# Altium PCB PCB6.PcbDoc (part 1 of 2)
Units mm, origin at the board's own origin, x right, y up, seen from the top; angles counter-clockwise.
Board outline 52.58 x 35.69 mm, 2 copper layers (Top Layer, Bottom Layer); 47 components, 153 nets, 462 pads, 249 vias.
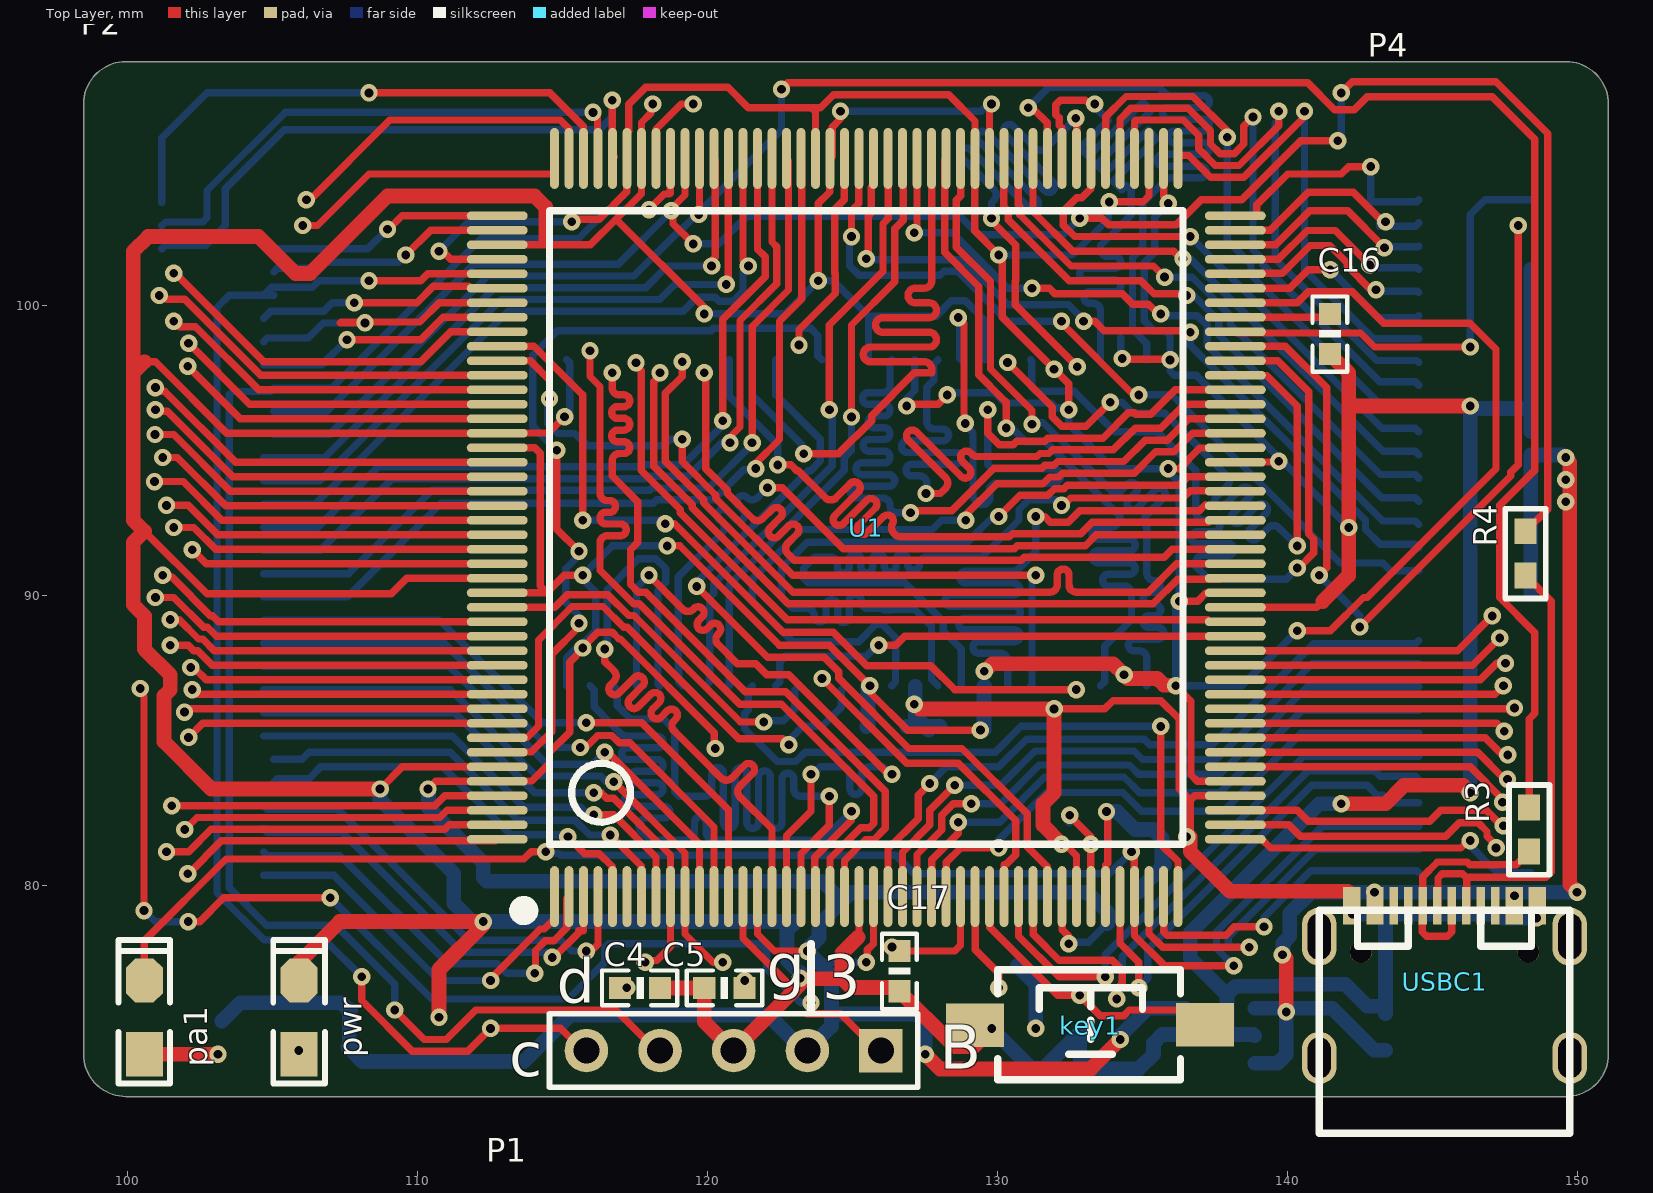
[diagram p0: Top Layer view]
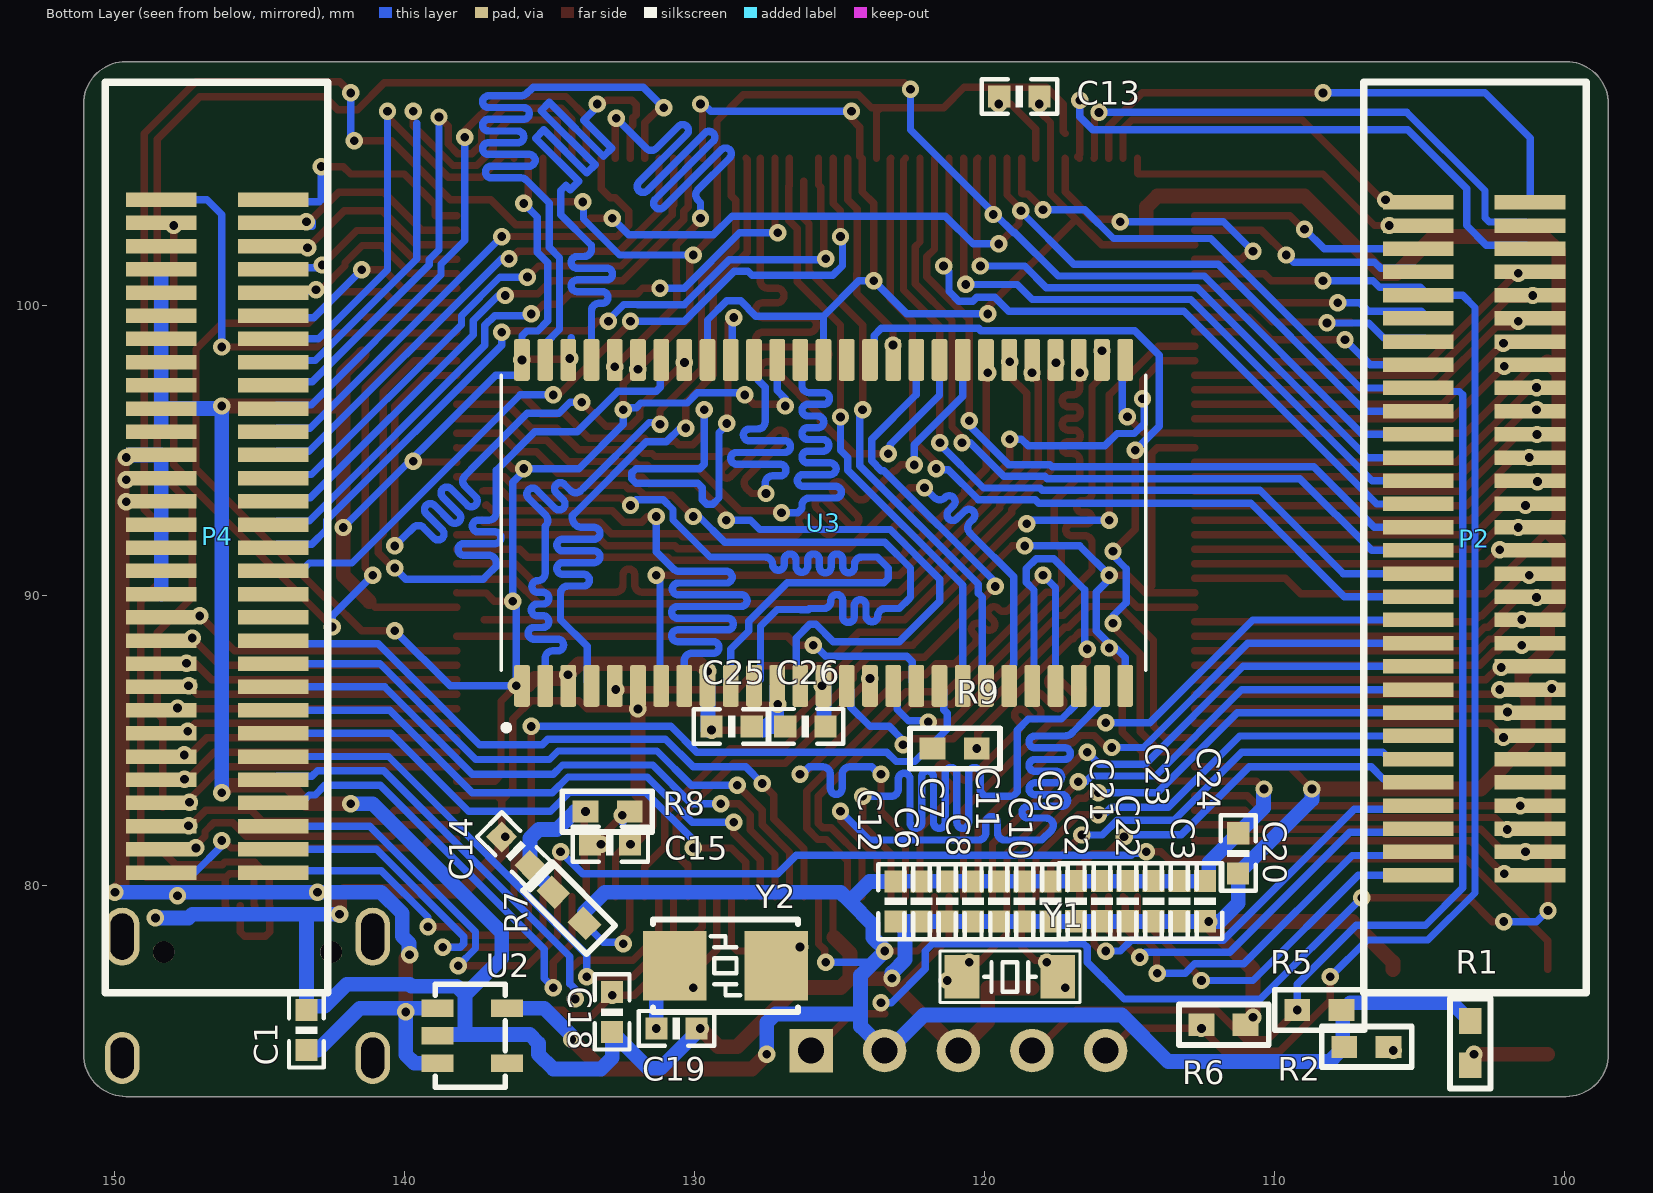
[diagram p1: Bottom Layer view, seen from below]

## Layer stack, top to bottom
Top Solder: solder mask 0.0102, Solder Resist, Dk 3.5
Top Layer: signal copper 0.0356
Dielectric 1: dielectric 0.32, FR-4, Dk 4.8
Bottom Layer: signal copper 0.0356
Bottom Solder: solder mask 0.0102, Solder Resist, Dk 3.5

## Board outline
98.488,74.168 98.488,106.934 cw(c99.949,106.934) 99.949,108.395 149.606,108.395 cw(c149.606,106.934) 151.067,106.934 151.067,74.168 cw(c149.606,74.168) 149.606,72.707 99.949,72.707 cw(c99.949,74.168)

## Design rules (kind name [scope] priority, off if disabled: settings)
Clearance [All] p1: gap=0.15 ignorepadtopadclearanceinfootprint=FALSE
Length Length_1 [InNetClass('sdram_d')] p1: maxlimit=28.6 minlimit=27.6
Length [InNetClass('sdram_a')] p2: maxlimit=27.443 minlimit=26.443
PolygonConnect [All] p1: connectstyle=Relief reliefconductorwidth=0.254 reliefentries=4 polygonreliefangle="90 Angle" airgapwidth=0.254
RoutingVias [All] p1: holewidth=0.711 width=1.27 viastyle="Through Hole" minholewidth=0.711 minwidth=1.27 maxholewidth=0.711 maxwidth=1.27
SolderMaskExpansion [All] p1: expansion=0.102 istentingtop=FALSE
Width [All] p1: maxlimit=1.524 minlimit=0.254 preferedwidth=0.254 minimp=50.000000 maximp=50.000000 favimp=50.000000
30 further rules are at their usual default settings.

## Classes and differential pairs
net class sdram_d: FMC_D0 FMC_D1 FMC_D2 FMC_D3 FMC_D4 FMC_D5 FMC_D6 FMC_D7 FMC_D8 FMC_D9 FMC_D10 FMC_D11 FMC_D12 FMC_D13 FMC_D14 FMC_D15
net class sdram_a: FMC_A0 FMC_A1 FMC_A2 FMC_A3 FMC_A4 FMC_A5 FMC_A6 FMC_A7 FMC_A8 FMC_A9 FMC_A10 FMC_A11 FMC_A12

## Components (designator, comment, footprint, x,y, rotation, side; value= is the part's Value field where it differs from the comment)
C1 "Cap Semi" 0603-C 143.385,74.308 r90 bottom value=105
C2 "Cap Semi" 0603-C 116.842,78.753 r90 bottom value=104
C3 "Cap Semi" 0603-C 113.286,78.753 r90 bottom value=105
C4 "" 0603-c 118.364,76.454 r180 top value=10P
C5 "" 0603-c 119.888,76.454 r0 top value=10P
C6 "" 0603-c 122.172,80.124 r270 bottom value=104
C7 "" 0603-c 121.283,80.124 r270 bottom value=104
C8 "" 0603-c 120.394,80.124 r270 bottom value=104
C9 "" 0603-c 117.727,80.124 r270 bottom value=104
C10 "" 0603-c 118.616,80.124 r270 bottom value=104
C11 "" 0603-c 119.505,80.124 r270 bottom value=106
C12 "" 0603-c 123.061,80.124 r270 bottom value=104
C13 "" 0603-c 119.494,107.19 r180 bottom value=2.2UF
C14 "" 0603-c 136.652,81.661 r225 bottom value=104
C15 "" 0603-c 133.604,81.407 r180 bottom value=104
C16 "" 0603-c 141.463,99.695 r270 top value=2.2UF
C17 "" 0603-c 126.619,77.724 r270 top value=20P
C18 "" 0603-c 132.842,74.93 r90 bottom value=104
C19 "" 0603-c 131.318,75.057 r180 bottom value=20P
C20 "104" 0603-c 111.254,80.404 r90 bottom
C21 "104" 0603-c 115.953,78.753 r90 bottom
C22 "104" 0603-c 115.064,78.753 r90 bottom
C23 "104" 0603-c 114.175,78.753 r90 bottom
C24 "104" 0603-c 112.397,78.753 r90 bottom
C25 "104" 0603-c 128.029,85.469 r0 bottom
C26 "104" 0603-c 126.873,85.471 r180 bottom
key1 "KEY" "TSW SMD-3*6*2.5" 133.223,75.184 r0 top
P1 "Header 5" HDR1X5 125.984,74.295 r180 top
P2 "Header 30X2" BTB60 103.143,91.947 r180 top
P4 "Header 30X2" BTB60 146.431,92.026 r0 top
pa1 "LED" "LED 0805G" 100.584,75.438 r90 top (schematic designator PPS1)
pwr "LED" "LED 0805G" 105.918,75.438 r90 top (schematic designator PPS2)
R1 "1k" 0603-R 103.251,73.787 r90 bottom
R2 "1k" 0603-r 106.072,74.422 r0 bottom
R3 "0Ω" 0603-r 148.336,81.153 r90 top
R4 "0Ω" 0603-r 148.209,90.678 r90 top
R5 "10K" 0603-r 107.696,75.692 r0 bottom
R6 "10K" 0603-r 110.998,75.184 r0 bottom
R7 "0" 0603-r 133.796,78.678 r45 bottom
R8 "0" 0603-r 133.761,82.533 r180 bottom
R9 "10K" 0603-r 120.269,84.709 r0 bottom
U1 "STM32H743IIT6" "LQFP176 24x24_M" 125.476,92.329 r0 top locked
U2 "RT9013" SOT23-5 137.668,74.803 r270 bottom
U3 "W9825G6KH-6" SOP80P1176X120-54N 125.552,92.488 r90 bottom locked
USBC1 "TYPE-C 3.1" TYPE-C-USB-17 145.417,76.665 r0 top locked
Y1 "32.768KHz" "OSC 3215-2P" 119.126,76.835 r180 bottom
Y2 "25M" "OSC 5032-2P" 128.933,77.216 r180 bottom

## Footprints (in the part's own frame and the unit in brackets; to place one, negate y for a bottom-side part, rotate by r counter-clockwise, add the part's x,y. Pads: shape width x height; smd on the part's side, far side on the other; paste and mask are expansions set on the pad)
0603-C [mil]
  rect 30x30 smd: 1(0,0) 2(54.5,-0.06)
  silkscreen extent -24,-24 79,24
0603-c [mil]
  rect 30x30 smd: 1(0,0) 2(54.5,-0.06)
  silkscreen extent -24,-24 79,24
0603-R [mil]
  rect 35x30 smd: 1(0,0) 2(60,0)
  silkscreen extent -31,-28 91,28, body extent -22,-19 82,19, height 39
0603-r [mil]
  rect 35x30 smd: 1(0,0) 2(60,0)
  silkscreen extent -31,-28 91,28, body extent -22,-19 82,19, height 39
BTB60 [mm]
  rect 2.44x0.5 smd far side: 1(-1.905,-11.594) 2(1.955,-11.594) 3(-1.905,-10.794) 4(1.955,-10.794) 5(-1.905,-9.994) 6(1.955,-9.994) 7(-1.905,-9.194) 8(1.955,-9.194) 9(-1.905,-8.394) 10(1.955,-8.394) 11(-1.905,-7.594) 12(1.955,-7.594) 13(-1.905,-6.794) 14(1.955,-6.794) 15(-1.905,-5.994) 16(1.955,-5.994) 17(-1.905,-5.194) 18(1.955,-5.194) 19(-1.905,-4.394) 20(1.955,-4.394) 21(-1.905,-3.594) 22(1.955,-3.594) 23(-1.905,-2.794) 24(1.955,-2.794) 25(-1.905,-1.994) 26(1.955,-1.994) 27(-1.905,-1.194) 28(1.955,-1.194) 29(-1.905,-0.394) 30(1.955,-0.394) 31(-1.905,0.406) 32(1.955,0.406) 33(-1.905,1.206) 34(1.955,1.206) 35(-1.905,2.006) 36(1.955,2.006) 37(-1.905,2.806) 38(1.955,2.806) 39(-1.905,3.606) 40(1.955,3.606) 41(-1.905,4.406) 42(1.955,4.406) 43(-1.905,5.206) 44(1.955,5.206) 45(-1.905,6.006) 46(1.955,6.006) 47(-1.905,6.806) 48(1.955,6.806) 49(-1.905,7.606) 50(1.955,7.606) 51(-1.905,8.406) 52(1.955,8.406) 53(-1.905,9.206) 54(1.955,9.206) 55(-1.905,10.006) 56(1.955,10.006) 57(-1.905,10.806) 58(1.955,10.806) 59(-1.905,11.606) 60(1.955,11.606)
HDR1X5 [mm] "Connector; Header; 5 Position"
  rect 1.5x1.5 hole 0.9: 1(0,0)
  round 1.5 hole 0.9: 2(2.54,0) 3(5.08,0) 4(7.62,0) 5(10.16,0)
  silkscreen extent -1.27,-1.27 11.43,1.27
"LED 0805G" [mil] "绿色0805LED"
  rect 60x50 smd: 1(-50,0)
  oct 60x50 smd: 2(50,0)
  silkscreen extent -90,-35 105,35, body extent -39,-25 39,25, height 32
"LQFP176 24x24_M" [mm] "176脚，体宽24x24mm，脚距0.5mm"
  oval 0.3x2.1 smd: 1(-10.75,-12.727) 2(-10.25,-12.727) 3(-9.75,-12.727) 4(-9.25,-12.727) 5(-8.75,-12.727) 6(-8.25,-12.727) 7(-7.75,-12.727) 8(-7.25,-12.727) 9(-6.75,-12.727) 10(-6.25,-12.727) 11(-5.75,-12.727) 12(-5.25,-12.727) 13(-4.75,-12.727) 14(-4.25,-12.727) 15(-3.75,-12.727) 16(-3.25,-12.727) 17(-2.75,-12.727) 18(-2.25,-12.727) 19(-1.75,-12.727) 20(-1.25,-12.727) 21(-0.75,-12.727) 22(-0.25,-12.727) 23(0.25,-12.727) 24(0.75,-12.727) 25(1.25,-12.727) 26(1.75,-12.727) 27(2.25,-12.727) 28(2.75,-12.727) 29(3.25,-12.727) 30(3.75,-12.727) 31(4.25,-12.727) 32(4.75,-12.727) 33(5.25,-12.727) 34(5.75,-12.727) 35(6.25,-12.727) 36(6.75,-12.727) 37(7.25,-12.727) 38(7.75,-12.727) 39(8.25,-12.727) 40(8.75,-12.727) 41(9.25,-12.727) 42(9.75,-12.727) 43(10.25,-12.727) 44(10.75,-12.727) 89(10.75,12.727) 90(10.25,12.727) 91(9.75,12.727) 92(9.25,12.727) 93(8.75,12.727) 94(8.25,12.727) 95(7.75,12.727) 96(7.25,12.727) 97(6.75,12.727) 98(6.25,12.727) 99(5.75,12.727) 100(5.25,12.727) 101(4.75,12.727) 102(4.25,12.727) 103(3.75,12.727) 104(3.25,12.727) 105(2.75,12.727) 106(2.25,12.727) 107(1.75,12.727) 108(1.25,12.727) 109(0.75,12.727) 110(0.25,12.727) 111(-0.25,12.727) 112(-0.75,12.727) 113(-1.25,12.727) 114(-1.75,12.727) 115(-2.25,12.727) 116(-2.75,12.727) 117(-3.25,12.727) 118(-3.75,12.727) 119(-4.25,12.727) 120(-4.75,12.727) 121(-5.25,12.727) 122(-5.75,12.727) 123(-6.25,12.727) 124(-6.75,12.727) 125(-7.25,12.727) 126(-7.75,12.727) 127(-8.25,12.727) 128(-8.75,12.727) 129(-9.25,12.727) 130(-9.75,12.727) 131(-10.25,12.727) 132(-10.75,12.727)
  oval 2.1x0.3 smd: 45(12.727,-10.75) 46(12.727,-10.25) 47(12.727,-9.75) 48(12.727,-9.25) 49(12.727,-8.75) 50(12.727,-8.25) 51(12.727,-7.75) 52(12.727,-7.25) 53(12.727,-6.75) 54(12.727,-6.25) 55(12.727,-5.75) 56(12.727,-5.25) 57(12.727,-4.75) 58(12.727,-4.25) 59(12.727,-3.75) 60(12.727,-3.25) 61(12.727,-2.75) 62(12.727,-2.25) 63(12.727,-1.75) 64(12.727,-1.25) 65(12.727,-0.75) 66(12.727,-0.25) 67(12.727,0.25) 68(12.727,0.75) 69(12.727,1.25) 70(12.727,1.75) 71(12.727,2.25) 72(12.727,2.75) 73(12.727,3.25) 74(12.727,3.75) 75(12.727,4.25) 76(12.727,4.75) 77(12.727,5.25) 78(12.727,5.75) 79(12.727,6.25) 80(12.727,6.75) 81(12.727,7.25) 82(12.727,7.75) 83(12.727,8.25) 84(12.727,8.75) 85(12.727,9.25) 86(12.727,9.75) 87(12.727,10.25) 88(12.727,10.75) 133(-12.727,10.75) 134(-12.727,10.25) 135(-12.727,9.75) 136(-12.727,9.25) 137(-12.727,8.75) 138(-12.727,8.25) 139(-12.727,7.75) 140(-12.727,7.25) 141(-12.727,6.75) 142(-12.727,6.25) 143(-12.727,5.75) 144(-12.727,5.25) 145(-12.727,4.75) 146(-12.727,4.25) 147(-12.727,3.75) 148(-12.727,3.25) 149(-12.727,2.75) 150(-12.727,2.25) 151(-12.727,1.75) 152(-12.727,1.25) 153(-12.727,0.75) 154(-12.727,0.25) 155(-12.727,-0.25) 156(-12.727,-0.75) 157(-12.727,-1.25) 158(-12.727,-1.75) 159(-12.727,-2.25) 160(-12.727,-2.75) 161(-12.727,-3.25) 162(-12.727,-3.75) 163(-12.727,-4.25) 164(-12.727,-4.75) 165(-12.727,-5.25) 166(-12.727,-5.75) 167(-12.727,-6.25) 168(-12.727,-6.75) 169(-12.727,-7.25) 170(-12.727,-7.75) 171(-12.727,-8.25) 172(-12.727,-8.75) 173(-12.727,-9.25) 174(-12.727,-9.75) 175(-12.727,-10.25) 176(-12.727,-10.75)
  silkscreen extent -12.06,-13.46 10.92,10.92, body extent -13,-13 13,13, height 1.45
"OSC 3215-2P" [mm] "3.2*1.5*0.6mm(长宽高)"
  rect 1.2x1.5 smd: 1(-1.65,0) 2(1.65,0)
  silkscreen extent -2.41,-0.89 2.41,0.89, body extent -1.6,-0.75 1.6,0.75, height 0.61
"OSC 5032-2P" [mm] "5mm*3.2mm*0.8mm(长*宽*高)"
  rect 2.2x2.4 smd: 1(-1.75,0) 2(1.75,0)
  silkscreen extent -2.5,-1.6 2.5,1.6, body extent -2.5,-1.6 2.5,1.6, height 0.86
SOP80P1176X120-54N [mm]
  rrect25% 1.44x0.54 smd: 1(-5.62,10.4) 2(-5.62,9.6) 3(-5.62,8.8) 4(-5.62,8) 5(-5.62,7.2) 6(-5.62,6.4) 7(-5.62,5.6) 8(-5.62,4.8) 9(-5.62,4) 10(-5.62,3.2) 11(-5.62,2.4) 12(-5.62,1.6) 13(-5.62,0.8) 14(-5.62,0) 15(-5.62,-0.8) 16(-5.62,-1.6) 17(-5.62,-2.4) 18(-5.62,-3.2) 19(-5.62,-4) 20(-5.62,-4.8) 21(-5.62,-5.6) 22(-5.62,-6.4) 23(-5.62,-7.2) 24(-5.62,-8) 25(-5.62,-8.8) 26(-5.62,-9.6) 27(-5.62,-10.4) 28(5.62,-10.4) 29(5.62,-9.6) 30(5.62,-8.8) 31(5.62,-8) 32(5.62,-7.2) 33(5.62,-6.4) 34(5.62,-5.6) 35(5.62,-4.8) 36(5.62,-4) 37(5.62,-3.2) 38(5.62,-2.4) 39(5.62,-1.6) 40(5.62,-0.8) 41(5.62,0) 42(5.62,0.8) 43(5.62,1.6) 44(5.62,2.4) 45(5.62,3.2) 46(5.62,4) 47(5.62,4.8) 48(5.62,5.6) 49(5.62,6.4) 50(5.62,7.2) 51(5.62,8) 52(5.62,8.8) 53(5.62,9.6) 54(5.62,10.4)
  silkscreen extent -7.16,-11.11 5.08,11.11, body extent -5.88,-11.11 5.88,11.11, height 1.2
SOT23-5 [mm]
  rect 0.6x1.1 smd: 1(-0.95,-1.2) 2(0,-1.2) 3(0.95,-1.2) 4(0.95,1.2) 5(-0.95,1.2)
  silkscreen extent -1.78,-1.27 1.78,1.14, body extent -1.55,-0.9 1.55,0.9, height 1.45
"TSW SMD-3*6*2.5" [mm] "3*6*2.5mm"
  rect 2x1.5 smd: 1(-3.996,-0.02) 2(3.937,0)
  silkscreen extent -3.21,-1.9 3.09,1.9, body extent -4,-1.88 4,1.62, height 2.59
TYPE-C-USB-17 [mm]
  oval 1.2x1.8 hole 0.8 slot 1.4 at 90 deg: 0(-4.32,-2.624) 0(4.32,-2.624)
  oval 1.2x2 hole 0.8 slot 1.6 at 90 deg: 0(-4.32,1.556) 0(4.32,1.556)
  rect 0.3x1.3 smd: A1(-3.35,2.623) A4(-2.55,2.623) A5(-1.25,2.623) A6(-0.25,2.623) A7(0.25,2.623) A8(-1.75,2.624) A9(2.55,2.623) A12(3.35,2.623) B1(3.05,2.623) B4(2.25,2.623) B5(1.75,2.623) B6(0.75,2.623) B7(-0.75,2.623) B8(1.25,2.624) B9(-2.25,2.623) B12(-3.05,2.623)
  round 0.75 hole 0.75 unplated: ""(-2.89,1.026) ""(2.89,1.026)
  silkscreen extent -4.32,-5.23 4.32,2.47

## Part data
C1 C2 C3: "Capacitor (Semiconductor SIM Model)", LatestRevisionDate=29-May-2009, LatestRevisionNote="IPC-7351 Footprint Added.", PackageDescription="Chip Capacitor", PackageReference=C1206, Published=8-Jun-2000, Publisher="Altium Limited"
C4 C5 C6 C7 C8 C9 C10 C11 C13 C14 C15 C16 C17 C18 C19: library part Cap_1_1, "Capacitor", LatestRevisionDate=17-Jul-2002, LatestRevisionNote="Re-released for DXP Platform.", PackageDescription="Radial Cap, Thru-Hole; 2 Leads; 0.3 in Pin Spacing", PackageReference=RAD-0.3, Published=8-Jun-2000, Publisher="Altium Limited"
C12: library part Cap_1_1, "104", LatestRevisionDate=17-Jul-2002, LatestRevisionNote="Re-released for DXP Platform.", PackageDescription="Radial Cap, Thru-Hole; 2 Leads; 0.3 in Pin Spacing", PackageReference=RAD-0.3, Published=8-Jun-2000, Publisher="Altium Limited"
C20 C21 C22 C23 C24 C25 C26: library part CAP, "无极性电容"
P1: "Header, 5-Pin"
P2 P4: "Header, 30-Pin, Dual row", LatestRevisionDate=17-Jul-2002, LatestRevisionNote="Re-released for DXP Platform.", Publisher="Altium Limited"
R1 R2 R3 R4 R5 R6 R7 R8: library part RES, "Resistor", LatestRevisionDate=17-Jul-2002, LatestRevisionNote="Re-released for DXP Platform.", PackageDescription="Axial Device, Thru-Hole; 2 Leads; 0.4 in Pin Spacing", PackageReference=AXIAL-0.4, Published=8-Jun-2000, Publisher="Altium Limited"
R9: library part RES
U1: BOM_LCSC Assembly=Yes, BOM_Manufacturer=STMicroelectronics, BOM_Manufacturer Part=STM32H743IIT6, BOM_Supplier=LCSC, BOM_Supplier Part=C89597, Contributor=LCSC, SMT Type=Extend, spicePre=U, spiceSymbolName=STM32H743IIT6
U3: library part IS42S16160B, "32MB SDRAM"
Y1 Y2: library part XTAL, "Crystal Oscillator", LatestRevisionDate=17-Jul-2002, LatestRevisionNote="Re-released for DXP Platform.", Published=8-Jun-2000, Publisher="Altium Limited"

## Via types
v1: diameter 0.6, hole 0.3, Top Layer to Bottom Layer, 249 vias

## Nets (pads, with @x,y where several pads share a name; then routed paths per layer and width w, separated by ;. In a path a pad name is that pad's centre, name@x,y a point inside that pad or via, vN(x,y) a via of type N, cw(c..) or ccw(c..) an arc to the next point about the centre after c; other vN are vias at no path point)
3.3V: C2.2 C3.2 C6.1 C7.1 C8.1 C9.1 C10.1 C11.1 C12.1 C20.2 C21.2 C22.2 C23.2 C24.2 C25.2 C26.2 P1.2 R1.2 R2.2 R5.1 R7.1 R9.1 U1.15 U1.23 U1.36 U1.49 U1.62 U1.72 U1.82 U1.91 U1.103 U1.114 U1.127 U1.136 U1.149 U1.159 U1.172 U2.5 U3.1 U3.3 U3.9 U3.14 U3.27 U3.43 U3.49 | length 240.9
  Top Layer w0.254: v1(110.363,83.312) 110.63,83.579 U1.172@112.749,83.579 112.758,83.588 113.941,83.588 114.554,84.201 114.554,84.582 115.247,85.275 115.247,87.688 115.697,88.138 v1(115.697,88.175) 115.697,88.192 116.22,88.715 116.718,88.715 116.948,88.485 117.001,88.485 120.232,85.254 120.232,84.746 v1(120.269,84.709) ; v1@110.795,101.93 111.146,101.579 U1.136@112.749,101.579 ; U1.159@112.749,90.079 114.463,90.079 ; U1.149@112.749,95.079 114.041,95.079 114.231,94.889 114.231,90.311 114.463,90.079 ; v1(115.316,102.87) 115.408,102.962 116.275,102.962 117.217,103.904 117.217,105.047 U1.127@117.226,105.056 ; v1(115.697,90.678) 115.062,90.678 114.463,90.079 ; U1.127@117.221,105.918 117.29,105.987 117.29,106.93 117.871,107.511 120.708,107.511 121.412,106.807 123.577,106.807 ; v1(118.618,91.694) 119.053,91.694 122.482,88.265 124.196,88.265 125.593,86.868 v1(125.603,86.868) 125.603,86.642 126.901,85.344 v1(129.413,85.344) ; U1.15@121.726,79.602 121.726,78.31 122.312,77.724 v1(123.444,77.724) ; U1.114@123.726,105.056 123.726,106.658 123.577,106.807 ; v1(125.476,77.343) 125.51,77.377 125.51,77.765 125.726,77.981 U1.23@125.726,79.602 ; v1(126.873,96.52) 126.936,96.584 127.953,96.584 v1(128.27,96.901) ; U1.36@132.226,79.602 132.235,79.593 132.235,78.458 132.461,78.232 v1(132.461,77.978) ; v1(132.461,96.393) 132.461,97.282 v1(131.953,97.79) 130.163,99.58 130.163,101.612 v1(130.048,101.727) 129.217,102.558 129.217,105.047 U1.103@129.226,105.056 129.226,106.348 128.317,107.257 124.348,107.257 123.898,106.807 123.577,106.807 ; v1(133.859,103.556) 135.018,103.556 135.226,103.764 U1.91@135.226,105.056 ; v1(135.89,94.361) 136.271,94.361 136.98,95.07 138.194,95.07 U1.72@138.203,95.079 ; v1(136.144,86.868) 136.675,86.337 136.675,83.797 136.893,83.579 U1.49@138.203,83.579 ; v1(136.271,89.789) 136.906,89.789 137.187,90.07 138.194,90.07 U1.62@138.203,90.079 ; U1.82@138.203,100.079 140.338,100.079 140.716,100.457 142.24,100.457 143.32,99.377 146.294,99.377 147.193,98.479 147.193,94.361 142.748,89.916 142.621,89.916 141.478,88.773 v1(140.335,88.773)
  Top Layer w0.508: v1(127.508,74.168) 128.016,73.66 133.223,73.66 v1(134.239,74.676) ; v1(129.54,87.376) 129.565,87.376 129.819,87.63 133.985,87.63 v1(134.366,87.249) ; v1@134.493,87.122 135.509,87.122 135.745,86.886 136.126,86.886 v1(136.144,86.868)
  Bottom Layer w0.254: v1(110.744,101.854) 111.76,102.87 v1(115.316,102.87) ; U3.27@115.152,86.868 115.152,87.847 115.48,88.175 v1(115.697,88.175) 115.697,88.323 116.147,88.773 116.147,90.101 115.697,90.551 v1(115.697,90.678) 116.713,91.694 v1(118.618,91.694) ; 123.919,77.343 v1(125.476,77.343) ; v1(126.873,96.52) 126.873,96.774 127.152,97.053 U3.43@127.152,98.108 ; v1(128.27,96.901) 128.339,96.97 129.906,96.97 130.252,96.624 131.849,96.624 132.014,96.459 132.395,96.459 v1(132.461,96.393) 132.461,95.885 133.985,94.361 v1(135.89,94.361) 135.89,94.267 136.271,93.886 v1(136.271,89.789) 136.271,89.695 136.144,89.568 v1(136.144,86.868) 138.43,86.868 v1(140.335,88.773) ; v1(130.048,101.727) 132.588,101.727 133.831,102.97 133.831,103.528 v1(133.859,103.556) ; v1(132.461,77.978) 132.507,78.024 133.142,78.024 R7.1@133.796,78.678
  Bottom Layer w0.508: R1.2@103.251,75.311 103.886,75.946 107.379,75.946 107.632,75.692 R5.1@107.696,75.692 107.646,75.642 R2.2@107.646,74.472 ; R2.2@107.596,74.422 107.66,74.422 107.787,74.295 107.787,74.231 108.104,73.914 113.665,73.914 115.269,75.518 122.094,75.518 123.317,74.295 P1.2@123.444,74.295 124.275,75.126 124.275,76.893 v1(123.444,77.724) 123.444,77.788 123.848,78.192 123.848,78.636 124.65,79.438 ; v1(110.363,83.312) 110.381,83.294 110.381,82.659 C20.2@111.252,81.788 112.268,80.772 112.268,80.264 C24.2@112.395,80.137 112.401,80.131 114.173,80.131 115.062,80.131 C2.2@116.846,80.131 ; C2.2@116.84,80.137 C2.2@116.846,80.131 ; 124.471,75.554 127.21,75.554 127.508,75.257 v1(127.508,74.168) ; C26.2@125.489,85.469 125.536,85.517 U3.14@125.536,86.852 ; C25.2@129.54,85.344 129.54,85.866 129.536,85.862 129.536,86.852 U3.9@129.552,86.868 ; R7.1@133.796,78.678 133.796,79.059 133.1,79.756 124.968,79.756 124.65,79.438 ; v1(134.239,74.676) 134.239,74.803 135.189,75.753 U2.5@136.468,75.753 ; C2.2@116.846,80.131 118.616,80.131 121.283,80.131 123.055,80.131 C12.1@123.061,80.124 123.965,80.124 124.65,79.438
5V: C1.1 P4.26 P4.28 P4.30 P4.32 P4.34 P4.36 P4.38 U2.1 U2.3 USBC1.A4 USBC1.A9 USBC1.B4 USBC1.B9 | length 42.8
  Top Layer w0.508: v1(139.827,77.597) 139.954,77.47 v1(139.954,75.626) ; v1(149.594,94.742) 149.594,94.717 149.733,94.578 149.733,80.035 149.987,79.781 v1(149.987,79.756)
  Bottom Layer w0.508: U2.3@138.868,73.853 139.656,73.853 139.954,74.151 v1(139.954,75.626) ; U2.1@138.868,75.753 141.544,75.753 142.989,74.308 C1.1@143.385,74.308 ; v1(139.827,77.597) 139.845,77.615 139.845,77.996 140.081,78.232 140.081,79.025 140.812,79.756 v1(143.002,79.756) v1(149.987,79.756) ; P4.26@148.386,90.032 P4.28@148.386,90.832 P4.30@148.386,91.632 P4.32@148.386,92.432 P4.34@148.386,93.232 P4.36@148.386,94.032 P4.38@148.386,94.832 148.39,94.828 149.483,94.828 149.569,94.742 v1(149.594,94.742)
  other v1: 147.828,79.629 149.594,93.218 149.594,93.98
BOOT0: P1.1 P2.44 U1.166 | length 48.4
  Top Layer w0.254: v1@100.457,86.614 100.572,86.499 v1(100.572,79.121) ; v1@102.108,78.74 102.489,78.74 103.314,79.566 v1(106.998,79.566) ; v1(102.235,86.741) 102.397,86.579 U1.166@112.749,86.579 ; 123.444,75.565 124.587,75.565 P1.1@125.984,74.168
  Bottom Layer w0.254: v1@100.584,79.121 100.965,78.74 v1(102.096,78.74) ; v1(106.998,79.566) 110.49,76.073 115.189,76.073 116.459,77.343 116.459,77.851 116.586,77.978 121.793,77.978 122.047,77.724 122.047,77.109 123.21,75.946 v1(123.571,75.946)
  other v1: 100.44,86.779
C0: U1.32 U3.16 | length 11.5
  Top Layer w0.254: v1(123.952,87.122) 126.873,84.201 128.651,84.201 130.625,82.227 130.625,81.041 130.287,80.703 130.226,80.703 U1.32@130.226,79.602
C1: P4.11 U1.33 | length 19.3
  Top Layer w0.254: U1.33@130.726,79.602 130.726,78.239 132.13,76.835 v1(133.72,76.835)
  Bottom Layer w0.254: v1(133.72,76.835) 133.72,77.597 140.555,84.432 P4.11@144.526,84.432
C2: P4.9 U1.34 | length 20.5
  Top Layer w0.254: U1.34@131.226,79.602 131.235,79.593 131.235,78.301 132.135,77.401 132.7,77.401 132.711,77.412 133.959,77.412 134.297,77.074 134.297,76.596 134.112,76.411 v1(134.112,76.073)
  Bottom Layer w0.254: v1(134.112,76.073) 134.112,76.411 134.297,76.596 134.297,77.528 140.716,83.947 143.002,83.947 143.194,83.755 144.403,83.755 P4.9@144.526,83.632
C3: U1.35 U3.37 | length 28.2
  Top Layer w0.254: v1(119.634,90.297) 122.071,87.86 124.03,87.86 124.529,87.361 124.529,87.126 126.946,84.709 128.778,84.709 131.029,82.458 131.029,81.315 131.717,80.627 131.717,79.611 U1.35@131.726,79.602
  Bottom Layer w0.254: v1(119.634,90.297) 119.634,90.452 123.474,94.292 123.556,94.292 123.894,94.63 123.894,95.371 122.352,96.913 U3.37@122.352,98.108
FMC_A0: U1.16 U3.23 | length 26.1
  Top Layer w0.254: v1(116.459,88.138) 116.459,88.011 116.459,87.703 116.777,87.385 cw(c116.598,87.205) 116.777,87.026 116.656,86.904 ccw(c116.799,86.761) 116.656,86.618 ccw(c116.799,86.761) 116.941,86.618 117.476,87.153 cw(c117.619,87.01) 117.762,87.153 cw(c117.619,87.01) 117.762,86.867 117.325,86.431 ccw(c117.468,86.288) 117.325,86.145 ccw(c117.468,86.288) 117.611,86.145 118.047,86.582 cw(c118.19,86.439) 118.333,86.582 cw(c118.19,86.439) 118.333,86.296 118.111,86.073 ccw(c118.253,85.931) 118.111,85.788 ccw(c118.253,85.931) 118.396,85.788 118.619,86.01 cw(c118.762,85.867) 118.904,86.01 cw(c118.762,85.867) 118.904,85.725 118.851,85.671 ccw(c119.03,85.491) 118.851,85.311 119.226,84.936 119.813,84.349 120.474,83.688 ccw(c120.653,83.868) 120.833,83.688 121.28,84.135 cw(c121.422,83.992) 121.565,84.135 cw(c121.422,83.992) 121.565,83.849 121.119,83.403 ccw(c121.298,83.223) 121.119,83.043 122.226,81.936 122.226,81.189 U1.16@122.226,79.602
  Bottom Layer w0.254: v1(116.459,88.138) 116.551,88.23 116.551,90.189 117.617,91.255 118.222,91.255 118.56,90.917 118.56,90.439 118.295,90.174 118.295,86.925 U3.23@118.352,86.868
FMC_A1: U1.17 U3.24 | length 25.7
  Top Layer w0.254: v1(117.983,90.678) 119.061,89.6 119.151,89.51 ccw(c119.331,89.69) 119.51,89.51 119.537,89.537 cw(c119.68,89.394) 119.823,89.537 cw(c119.68,89.394) 119.823,89.251 119.7,89.129 ccw(c119.843,88.986) 119.7,88.843 ccw(c119.843,88.986) 119.986,88.843 120.108,88.965 cw(c120.251,88.823) 120.394,88.965 cw(c120.251,88.823) 120.394,88.68 120.367,88.653 ccw(c120.547,88.473) 120.367,88.294 121.031,87.63 121.041,87.63 121.666,87.63 122.047,87.249 122.809,87.249 126.238,83.82 v1(126.365,83.82) ; U1.17@122.726,79.602 122.726,81.705 123.571,82.55 v1(123.571,83.82)
  Bottom Layer w0.254: U3.24@117.552,86.868 117.552,90.247 v1(117.983,90.678) ; v1(123.571,83.82) 123.639,83.82 123.893,84.074 124.127,84.074 124.658,84.074 cw(c124.658,83.82) 124.912,83.82 124.912,83.329 ccw(c125.114,83.329) 125.114,83.127 ccw(c125.114,83.329) 125.316,83.329 125.316,83.82 cw(c125.57,83.82) 125.57,84.074 126.043,84.074 126.297,83.82 v1(126.365,83.82)
FMC_A2: U1.18 U3.25 | length 27
  Top Layer w0.254: U1.18@123.226,79.602 123.226,81.083 124.206,82.063 v1(124.206,83.058)
  Bottom Layer w0.254: U3.25@116.752,86.868 116.895,86.725 116.895,86.178 117.348,85.725 118.491,85.725 118.872,85.344 118.872,83.207 119.021,83.058 119.765,83.058 119.892,83.058 ccw(c119.892,83.312) 120.146,83.312 120.146,83.849 cw(c120.348,83.849) 120.348,84.051 cw(c120.348,83.849) 120.55,83.849 120.55,82.159 ccw(c120.752,82.159) 120.752,81.957 ccw(c120.752,82.159) 120.954,82.159 120.954,83.849 cw(c121.156,83.849) 121.156,84.051 cw(c121.156,83.849) 121.358,83.849 121.358,82.159 ccw(c121.56,82.159) 121.56,81.957 ccw(c121.56,82.159) 121.762,82.159 121.762,83.735 cw(c121.964,83.735) 121.964,83.937 cw(c121.964,83.735) 122.166,83.735 122.166,82.159 ccw(c122.368,82.159) 122.368,81.957 ccw(c122.368,82.159) 122.57,82.159 122.57,83.653 cw(c122.772,83.653) 122.772,83.855 cw(c122.772,83.653) 122.974,83.653 122.974,83.312 ccw(c123.228,83.312) 123.228,83.058 123.793,83.058 123.92,83.058 v1(124.206,83.058)
FMC_A3: U1.19 U3.26 | length 26.2
  Top Layer w0.254: U1.19@123.698,80.538 123.698,80.959 124.968,82.229 v1(124.968,82.55)
  Bottom Layer w0.254: U3.26@115.952,86.868 116.095,86.725 116.095,86.143 116.655,85.583 116.655,85.575 116.864,85.366 116.991,85.239 116.992,85.238 ccw(c117.235,85.483) 117.235,85.138 118.266,85.138 cw(c118.266,84.936) 118.468,84.936 cw(c118.266,84.936) 118.266,84.734 117.238,84.734 ccw(c117.238,84.532) 117.036,84.532 ccw(c117.238,84.532) 117.238,84.33 118.266,84.33 cw(c118.266,84.128) 118.468,84.128 cw(c118.266,84.128) 118.266,83.926 117.546,83.926 ccw(c117.546,83.724) 117.344,83.724 ccw(c117.546,83.724) 117.546,83.522 118.266,83.522 cw(c118.266,83.32) 118.468,83.32 cw(c118.266,83.32) 118.266,83.118 117.337,83.118 ccw(c117.337,82.916) 117.135,82.916 ; 117.135,82.916 ccw(c117.337,82.916) 117.337,82.714 118.508,82.714 cw(c118.508,82.512) 118.71,82.512 cw(c118.508,82.512) 118.508,82.31 117.883,82.31 ccw(c117.883,82.056) 117.704,81.877 118.007,81.574 118.028,81.553 118.364,81.553 119.299,81.553 ccw(c119.299,81.807) 119.553,81.807 119.553,82.159 cw(c119.755,82.159) 119.755,82.361 cw(c119.755,82.159) 119.957,82.159 119.957,81.807 ccw(c120.211,81.807) 120.211,81.553 120.65,81.553 123.971,81.553 v1(124.968,82.55)
FMC_A4: U1.20 U3.29 | length 26.8
  Top Layer w0.254: v1(115.951,98.425) 115.951,97.536 116.297,97.19 116.297,94.274 116.297,93.513 ccw(c116.551,93.513) 116.551,93.259 116.629,93.259 cw(c116.629,93.057) 116.831,93.057 cw(c116.629,93.057) 116.629,92.855 116.496,92.855 ccw(c116.496,92.653) 116.294,92.653 ccw(c116.496,92.653) 116.496,92.451 116.996,92.451 cw(c116.996,92.249) 117.198,92.249 cw(c116.996,92.249) 116.996,92.047 116.551,92.047 ccw(c116.551,91.793) 116.297,91.793 116.297,91.262 116.297,90.85 117.45,89.697 117.647,89.697 121.111,86.233 122.555,86.233 125.73,83.058 125.73,82.122 125.581,81.973 125.283,81.973 124.226,80.916 U1.20@124.226,79.602
FMC_A5: U1.21 U3.30 | length 26.5
  Top Layer w0.254: v1(116.713,97.663) 116.713,97.155 ccw(c116.967,97.155) 116.967,96.901 117.117,96.901 cw(c117.117,96.699) 117.319,96.699 cw(c117.117,96.699) 117.117,96.497 116.903,96.497 ccw(c116.903,96.295) 116.701,96.295 ccw(c116.903,96.295) 116.903,96.093 117.117,96.093 cw(c117.117,95.891) 117.319,95.891 cw(c117.117,95.891) 117.117,95.689 116.903,95.689 ccw(c116.903,95.487) 116.701,95.487 ccw(c116.903,95.487) 116.903,95.285 117.117,95.285 cw(c117.117,95.083) 117.319,95.083 cw(c117.117,95.083) 117.117,94.881 116.967,94.881 ccw(c116.967,94.627) 116.713,94.627 116.713,94.367 116.713,94.107 117.602,93.218 117.602,91.821 117.348,91.567 117.348,90.37 117.617,90.101 117.871,90.101 121.3,86.672 122.697,86.672 126.134,83.235 126.134,81.954 125.749,81.569 125.451,81.569 124.726,80.844 U1.21@124.726,79.602
FMC_A6: U1.60 U3.31 | length 25.5
  Top Layer w0.254: v1(117.536,98.011) 117.536,97.917 117.723,97.731 117.723,94.294 119.068,92.949 119.068,92.842 122.756,89.154 U1.60@137.262,89.154
FMC_A7: U1.63 U3.32 | length 25.2
  Top Layer w0.254: v1(118.364,97.663) 118.364,97.569 118.145,97.35 118.145,94.443 119.472,93.116 119.472,93.009 122.784,89.697 135.363,89.697 136.217,90.551 U1.63@137.668,90.551
FMC_A8: U1.64 U3.33 | length 26.9
  Top Layer w0.254: v1(119.126,98.044) 119.126,97.536 118.549,96.959 118.549,94.611 119.876,93.284 119.876,93.176 122.951,90.101 131.22,90.101 131.809,90.101 ccw(c131.809,90.355) 132.063,90.355 132.063,90.696 cw(c132.265,90.696) 132.265,90.898 cw(c132.265,90.696) 132.467,90.696 132.467,90.355 ccw(c132.721,90.355) 132.721,90.101 133.252,90.101 135.196,90.101 136.174,91.079 U1.64@138.203,91.079
FMC_A9: U1.65 U3.34 | length 26
  Top Layer w0.254: v1(119.888,97.663) 119.946,97.605 119.946,94.356 120.559,93.744 120.684,93.618 120.684,93.511 121.553,92.642 ccw(c121.733,92.822) 121.912,92.642 122.233,92.963 cw(c122.376,92.82) 122.519,92.963 cw(c122.376,92.82) 122.519,92.677 122.161,92.32 ccw(c122.304,92.177) 122.161,92.034 ccw(c122.304,92.177) 122.447,92.034 122.804,92.392 cw(c122.947,92.249) 123.09,92.392 cw(c122.947,92.249) 123.09,92.106 122.769,91.785 ccw(c122.949,91.605) 122.769,91.426 122.997,91.198 124.219,91.198 130.822,91.198 130.926,91.302 135.752,91.302 136.029,91.579 U1.65@138.203,91.579
FMC_A10: U1.66 U3.22 | length 27.1
  Top Layer w0.254: v1(122.069,93.704) 122.577,93.704 124.679,91.602 130.581,91.602 130.685,91.706 133.035,91.706 133.404,92.075 138.199,92.075 U1.66@138.203,92.079
  Bottom Layer w0.254: U3.22@119.152,86.868 119.009,87.011 119.009,87.6 118.999,87.61 118.999,90.633 120.418,92.053 120.508,92.142 ccw(c120.329,92.322) 120.508,92.502 120.395,92.614 cw(c120.538,92.757) 120.395,92.9 cw(c120.538,92.757) 120.681,92.9 120.953,92.628 ccw(c121.096,92.771) 121.239,92.628 ccw(c121.096,92.771) 121.239,92.914 121.075,93.078 cw(c121.218,93.221) 121.075,93.363 cw(c121.218,93.221) 121.36,93.363 121.365,93.359 ccw(c121.545,93.538) 121.724,93.359 v1(122.069,93.704)
FMC_A11: U1.67 U3.35 | length 26.1
  Top Layer w0.254: v1(122.428,94.488) 122.882,94.488 123.078,94.292 123.132,94.292 123.982,93.442 124.072,93.352 ccw(c124.251,93.532) 124.431,93.352 124.922,93.844 cw(c125.065,93.701) 125.208,93.844 cw(c125.065,93.701) 125.208,93.558 124.394,92.744 ccw(c124.537,92.601) 124.394,92.458 ccw(c124.537,92.601) 124.68,92.458 125.494,93.272 cw(c125.637,93.13) 125.78,93.272 cw(c125.637,93.13) 125.78,92.987 125.227,92.435 ccw(c125.37,92.292) 125.227,92.149 ccw(c125.37,92.292) 125.513,92.149 126.065,92.701 cw(c126.208,92.558) 126.351,92.701 cw(c126.208,92.558) 126.351,92.415 ; 126.35,92.415 126.347,92.394 ccw(c126.69,92.351) 126.69,92.006 127.005,92.006 127.185,92.006 130.414,92.006 130.518,92.11 132.867,92.11 133.263,92.506 137.264,92.506 U1.67@137.341,92.583
  Bottom Layer w0.254: U3.35@120.752,98.108 120.752,96.853 122.428,95.177 v1(122.428,94.488)
FMC_A12: U1.106 U3.36 | length 26.6
  Top Layer w0.254: v1(123.317,94.869) 124.514,94.869 125.661,96.016 125.661,96.187 127.136,97.663 127.735,97.663 127.735,97.79 ccw(c127.481,97.79) 127.481,98.044 125.626,98.044 cw(c125.626,98.298) 125.626,98.552 127.644,98.552 ccw(c127.644,98.806) 127.644,99.06 126.047,99.06 cw(c126.047,99.314) 126.047,99.568 127.644,99.568 ccw(c127.644,99.822) 127.644,100.076 127.17,100.076 cw(c127.17,100.33) 127.17,100.584 127.481,100.584 ccw(c127.481,100.838) 127.735,100.838 127.735,102.434 127.735,105.047 U1.106@127.726,105.056
  Bottom Layer w0.254: U3.36@121.552,98.108 121.552,96.888 123.251,95.189 123.251,94.935 v1(123.317,94.869)
FMC_BA0: U1.108 U3.20 | length 20.7
  Top Layer w0.254: v1(124.968,96.139) 124.968,99.314 126.457,100.803 126.457,102.635 126.746,102.924 126.746,104.103 126.735,104.115 126.735,105.047 U1.108@126.726,105.056
  Bottom Layer w0.254: U3.20@120.752,86.868 120.752,90.345 124.714,94.307 124.714,94.742 124.968,94.996 v1(124.968,96.139)
FMC_BA1: U1.109 U3.21 | length 20.1
  Top Layer w0.254: v1(124.206,96.393) 124.206,99.314 126.053,101.161 126.053,102.802 126.238,102.987 126.238,104.111 126.235,104.115 U1.109@126.235,104.264
  Bottom Layer w0.254: U3.21@119.952,86.868 120.084,87 120.084,89.931 120.211,90.058 120.211,90.376 124.298,94.463 124.298,96.301 v1(124.206,96.393)
FMC_D0: U1.104 U3.2 | length 28.2
  Top Layer w0.254: U1.104@128.726,105.056 128.735,105.047 128.735,103.77 128.582,103.617 128.582,101.996 129.759,100.819 129.759,97.795 131.191,96.363 v1(131.191,95.885)
  Bottom Layer w0.254: v1(131.191,95.885) 131.191,95.949 131.572,95.949 133.826,93.694 133.916,93.604 ccw(c134.096,93.784) 134.275,93.604 ; 134.275,93.604 134.485,93.814 cw(c134.628,93.671) 134.771,93.814 cw(c134.628,93.671) 134.771,93.528 134.524,93.282 ccw(c134.667,93.139) 134.524,92.996 ccw(c134.667,93.139) 134.81,92.996 135.438,93.625 cw(c135.581,93.482) 135.724,93.625 cw(c135.581,93.482) 135.724,93.339 135.132,92.747 ccw(c135.312,92.568) 135.132,92.388 135.152,92.368 135.152,91.838 135.152,90.753 ccw(c135.406,90.753) 135.406,90.499 cw(c135.406,90.297) 135.608,90.297 cw(c135.406,90.297) 135.406,90.095 135.226,90.095 ccw(c135.226,89.893) 135.024,89.893 ccw(c135.226,89.893) 135.226,89.691 135.426,89.691 cw(c135.426,89.489) 135.628,89.489 cw(c135.426,89.489) 135.426,89.287 135.226,89.287 ccw(c135.226,89.085) 135.024,89.085 ccw(c135.226,89.085) 135.226,88.883 135.538,88.883 cw(c135.538,88.681) 135.74,88.681 cw(c135.538,88.681) 135.538,88.479 134.718,88.479 ccw(c134.718,88.277) 134.516,88.277 ccw(c134.718,88.277) 134.718,88.075 134.898,88.075 cw(c134.898,87.821) 135.152,87.821 135.152,87.694 135.152,86.885 U3.2@135.152,86.868
FMC_D1: U1.105 U3.4 | length 28.1
  Top Layer w0.254: U1.105@128.226,105.056 128.178,105.008 128.178,101.819 129.355,100.642 129.355,97.594 130.175,96.774 130.302,96.647 v1(130.302,95.758)
  Bottom Layer w0.254: v1(130.302,95.758) 130.502,95.758 130.974,95.286 131.663,95.286 133.985,92.964 134.213,92.736 ; U3.4@133.552,86.868 133.695,87.011 133.695,88.229 134.62,89.154 134.62,89.535 134.62,90.058 ccw(c134.366,90.058) 134.366,90.312 133.825,90.312 cw(c133.825,90.514) 133.623,90.514 cw(c133.825,90.514) 133.825,90.716 134.546,90.716 ccw(c134.546,90.918) 134.748,90.918 ccw(c134.546,90.918) 134.546,91.12 133.46,91.12 cw(c133.46,91.322) 133.258,91.322 cw(c133.46,91.322) 133.46,91.524 134.546,91.524 ccw(c134.546,91.726) 134.748,91.726 ccw(c134.546,91.726) 134.546,91.928 133.46,91.928 cw(c133.46,92.13) 133.258,92.13 cw(c133.46,92.13) 133.46,92.332 133.873,92.332 ccw(c133.873,92.677) 134.216,92.711 134.214,92.735 ; 134.213,92.736 134.214,92.735
FMC_D2: U1.142 U3.5 | length 27.4
  Top Layer w0.254: U1.142@112.749,98.579 114.019,98.579 115.697,96.901 v1(115.697,92.583) ; v1(118.55,92.456) 118.862,92.456 122.603,88.715 124.337,88.715 125.491,87.561 127.704,87.561 128.524,86.741 v1(132.715,86.741)
  Bottom Layer w0.254: v1(115.697,92.583) 118.423,92.583 v1(118.55,92.456) ; U3.5@132.733,86.887 U3.5@132.752,86.868
FMC_D3: U1.143 U3.7 | length 27.2
  Top Layer w0.254: U1.143@112.749,98.079 112.753,98.075 113.888,98.075 114.554,97.409 v1(114.554,96.774) ; v1(119.126,95.377) 119.126,94.605 120.28,93.451 120.28,93.344 122.946,90.678 v1(131.318,90.678)
  Bottom Layer w0.254: v1(114.554,96.774) 114.496,96.716 114.496,95.911 114.834,95.573 115.428,95.573 115.857,95.144 116.84,95.144 118.491,95.144 118.724,95.377 v1(119.126,95.377) ; U3.7@131.152,86.868 131.191,86.907 131.191,90.457 131.318,90.584 v1(131.318,90.678)
FMC_D4: U1.68 U3.8 | length 27.3
  Top Layer w0.254: v1(131.318,92.71) 131.63,92.71 131.826,92.514 132.446,92.514 132.842,92.91 136.96,92.91 137.172,93.123 U1.68@137.204,93.091
  Bottom Layer w0.254: U3.8@130.352,86.868 130.352,87.61 130.352,87.737 ccw(c130.098,87.737) 130.098,87.991 129.358,87.991 cw(c129.358,88.193) 129.156,88.193 cw(c129.358,88.193) 129.358,88.395 130.585,88.395 ccw(c130.585,88.597) 130.787,88.597 ccw(c130.585,88.597) 130.585,88.799 128.865,88.799 cw(c128.865,89.001) 128.663,89.001 cw(c128.865,89.001) 128.865,89.203 130.585,89.203 ccw(c130.585,89.405) 130.787,89.405 ccw(c130.585,89.405) 130.585,89.607 128.39,89.607 cw(c128.39,89.809) 128.188,89.809 cw(c128.39,89.809) 128.39,90.011 130.563,90.011 ccw(c130.563,90.213) 130.765,90.213 ccw(c130.563,90.213) 130.563,90.415 128.906,90.415 cw(c128.906,90.617) 128.704,90.617 cw(c128.906,90.617) 128.906,90.819 130.538,90.819 ccw(c130.538,91.073) 130.717,90.893 131.318,91.494 131.318,91.694 v1(131.318,92.71)
FMC_D5: U1.69 U3.10 | length 27.1
  Top Layer w0.254: v1(132.207,93.091) 132.275,93.091 132.529,93.345 136.398,93.345 136.652,93.599 137.25,93.599 137.262,93.588 U1.69@137.303,93.588
  Bottom Layer w0.254: U3.10@128.752,86.868 128.752,88.138 128.131,88.759 128.131,89.093 126.8,90.424 123.466,90.424 123.317,90.573 123.317,90.932 123.698,91.313 124.229,91.313 cw(c124.229,91.059) 124.483,91.059 124.483,90.97 ccw(c124.685,90.97) 124.685,90.768 ccw(c124.685,90.97) 124.887,90.97 124.887,91.215 cw(c125.089,91.215) 125.089,91.417 cw(c125.089,91.215) 125.291,91.215 125.291,90.97 ccw(c125.493,90.97) 125.493,90.768 ccw(c125.493,90.97) 125.695,90.97 125.695,91.215 cw(c125.897,91.215) 125.897,91.417 cw(c125.897,91.215) 126.099,91.215 126.099,90.989 ccw(c126.301,90.989) 126.301,90.787 ccw(c126.301,90.989) 126.503,90.989 126.503,91.215 cw(c126.705,91.215) 126.705,91.417 cw(c126.705,91.215) 126.907,91.215 126.907,91.059 ccw(c127.109,91.059) 127.109,90.857 ccw(c127.109,91.059) 127.311,91.059 cw(c127.565,91.059) 127.565,91.313 128.143,91.313 129.467,91.313 130.741,92.587 130.741,92.949 131.079,93.287 132.011,93.287 v1(132.207,93.091)
FMC_D6: U1.70 U3.11 | length 28.2
  Top Layer w0.254: v1(130.048,92.71) 130.776,93.438 131.738,93.438 131.968,93.668 132.28,93.668 132.396,93.784 136.265,93.784 136.56,94.079 U1.70@138.203,94.079
  Bottom Layer w0.254: 126.339,89.499 126.083,89.499 126.047,89.535 125.552,89.535 cw(c125.552,89.789) 125.298,89.789 125.298,89.818 ccw(c125.096,89.818) 125.096,90.02 ccw(c125.096,89.818) 124.894,89.818 124.894,89.258 cw(c124.692,89.258) 124.692,89.056 cw(c124.692,89.258) 124.49,89.258 124.49,89.64 ccw(c124.288,89.64) 124.288,89.842 ccw(c124.288,89.64) 124.086,89.64 124.086,89.281 cw(c123.884,89.281) 123.884,89.079 cw(c123.884,89.281) 123.682,89.281 ccw(c123.428,89.281) 123.428,89.535 122.936,89.535 122.598,89.873 122.555,89.916 122.555,90.932 123.444,91.821 128.959,91.821 129.848,92.71 v1(130.048,92.71) ; 126.34,89.5 127.152,89.5 127.727,88.925 127.727,87.093 U3.11@127.952,86.868
FMC_D7: U1.73 U3.13 | length 27.3
  Top Layer w0.254: v1(128.905,92.583) 128.905,92.764 129.983,93.842 131.571,93.842 131.801,94.072 132.113,94.072 132.241,94.2 134.713,94.2 135.451,94.938 136.086,94.938 136.727,95.579 U1.73@138.203,95.579
  Bottom Layer w0.254: U3.13@126.352,86.868 126.485,87.001 126.485,87.716 126.492,87.723 126.492,88.519 126.024,88.987 125.813,88.987 125.218,88.392 122.936,88.392 121.539,89.789 121.539,90.551 123.248,92.26 127.747,92.26 128.07,92.583 v1(128.905,92.583)
FMC_D8: U1.74 U3.42 | length 27.3
  Top Layer w0.254: v1(127,92.837) 127.076,92.913 128.419,92.913 129.879,94.373 131.53,94.373 131.633,94.476 131.946,94.476 132.074,94.604 134.355,94.604 135.093,95.342 135.855,95.342 136.592,96.079 U1.74@138.203,96.079
  Bottom Layer w0.254: U3.42@126.352,98.108 126.296,98.052 126.296,97.674 126.296,97.235 cw(c126.042,97.235) 126.042,96.981 125.548,96.981 ccw(c125.548,96.779) 125.346,96.779 ccw(c125.548,96.779) 125.548,96.577 126.094,96.577 cw(c126.094,96.375) 126.296,96.375 cw(c126.094,96.375) 126.094,96.173 125.747,96.173 ccw(c125.747,95.971) 125.545,95.971 ccw(c125.747,95.971) 125.747,95.769 126.094,95.769 cw(c126.094,95.567) 126.296,95.567 cw(c126.094,95.567) 126.094,95.365 125.574,95.365 ccw(c125.574,95.163) 125.372,95.163 ccw(c125.574,95.163) 125.574,94.961 126.094,94.961 cw(c126.094,94.759) 126.296,94.759 cw(c126.094,94.759) 126.094,94.557 125.32,94.557 ccw(c125.32,94.355) 125.118,94.355 ccw(c125.32,94.355) 125.32,94.153 126.253,94.153 cw(c126.253,93.951) 126.455,93.951 cw(c126.253,93.951) 126.253,93.749 125.136,93.749 ccw(c125.136,93.547) 124.934,93.547 ccw(c125.136,93.547) 125.136,93.345 126.042,93.345 cw(c126.042,93.091) 126.296,93.091 126.296,92.986 126.318,92.964 126.445,92.837 v1(127,92.837)
FMC_D9: U1.75 U3.44 | length 28.3
  Top Layer w0.254: v1(127.537,93.501) 128.027,93.501 128.125,93.599 128.215,93.689 ccw(c128.035,93.868) 128.215,94.048 126.921,95.342 cw(c127.063,95.485) 126.921,95.628 cw(c127.063,95.485) 127.206,95.628 128.741,94.092 ccw(c128.884,94.235) 129.027,94.092 ccw(c128.884,94.235) 129.027,94.378 128.787,94.618 cw(c128.93,94.761) 128.787,94.904 cw(c128.93,94.761) 129.073,94.904 129.125,94.851 ccw(c129.305,95.031) 129.305,94.777 130.457,94.777 131.363,94.777 131.466,94.88 131.778,94.88 131.906,95.008 133.997,95.008 134.747,95.758 135.636,95.758 136.457,96.579 U1.75@138.203,96.579
  Bottom Layer w0.254: v1(127.537,93.501) 127.566,93.53 127.566,93.729 127.566,93.856 ccw(c127.312,93.856) 127.312,94.11 127.05,94.11 cw(c127.05,94.312) 126.848,94.312 cw(c127.05,94.312) 127.05,94.514 128.553,94.514 ccw(c128.553,94.716) 128.755,94.716 ccw(c128.553,94.716) 128.553,94.918 126.892,94.918 cw(c126.892,95.12) 126.69,95.12 cw(c126.892,95.12) 126.892,95.322 128.114,95.322 ccw(c128.114,95.524) 128.316,95.524 ccw(c128.114,95.524) 128.114,95.726 127.82,95.726 cw(c127.82,95.98) 127.566,95.98 127.566,97.17 U3.44@127.809,97.413 ; U3.44@127.809,97.414 127.809,97.965 U3.44@127.952,98.108
FMC_D10: U1.76 U3.45 | length 26.5
  Top Layer w0.254: v1(128.651,99.568) 128.847,99.372 v1@128.847,96.07 ; v1(129.667,96.393) 129.667,95.577 130.063,95.181 130.541,95.181 130.668,95.308 131.635,95.308 131.739,95.412 133.639,95.412 134.508,96.281 134.718,96.281 134.765,96.234 135.287,96.234 136.132,97.079 U1.76@138.203,97.079
  Bottom Layer w0.254: v1(128.651,99.568) 128.702,99.517 128.702,98.158 U3.45@128.752,98.108 ; v1(128.893,95.918) 128.893,95.863 129.159,95.597 129.159,93.345 129.371,93.133 129.582,93.133 129.731,93.281 129.731,93.704 129.879,93.853 132.017,93.853 132.165,94.002 132.165,94.212 132.017,94.361 129.816,94.361 129.667,94.51 v1(129.667,96.393)
FMC_D11: U1.77 U3.47 | length 26.5
  Top Layer w0.254: v1(130.35,98.021) 131.884,96.486 131.884,96.154 132.222,95.816 133.054,95.816 v1(133.885,96.647) ; U1.77@138.203,97.579 138.212,97.57 139.285,97.57 140.335,96.52 v1(140.335,91.694)
  Bottom Layer w0.254: v1(133.885,96.647) 134.293,96.647 134.674,96.266 135.763,96.266 137.541,94.488 137.916,94.113 cw(c137.737,93.933) 137.916,93.753 ; 137.916,93.753 137.554,93.391 ccw(c137.697,93.248) 137.554,93.105 ccw(c137.697,93.248) 137.839,93.105 138.398,93.663 cw(c138.541,93.52) 138.683,93.663 cw(c138.541,93.52) 138.683,93.378 138.125,92.819 ccw(c138.268,92.676) 138.125,92.534 ccw(c138.268,92.676) 138.411,92.534 138.969,93.092 cw(c139.112,92.949) 139.255,93.092 cw(c139.112,92.949) 139.255,92.806 138.696,92.248 ccw(c138.839,92.105) 138.696,91.962 ccw(c138.839,92.105) 138.982,91.962 139.345,92.325 cw(c139.524,92.145) 139.704,92.325 140.017,92.012 v1(140.335,91.694)